# Altium PCB PCB1.PcbDoc
Units mil, origin at the board's own origin, x right, y up, seen from the top; angles counter-clockwise.
Board outline 6000 x 4000 mil, 2 copper layers (Top Layer, Bottom Layer); 47 components, 98 nets, 286 pads, 0 vias.
Unrouted connection lines stored in the file: 172.
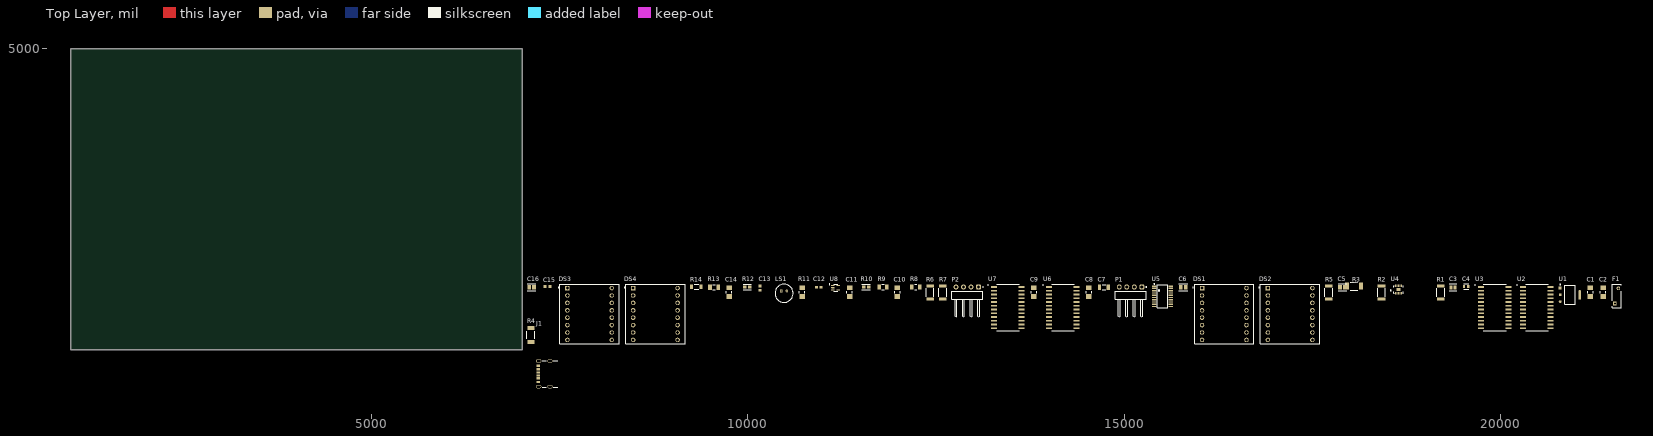
[diagram p0: Top Layer view]
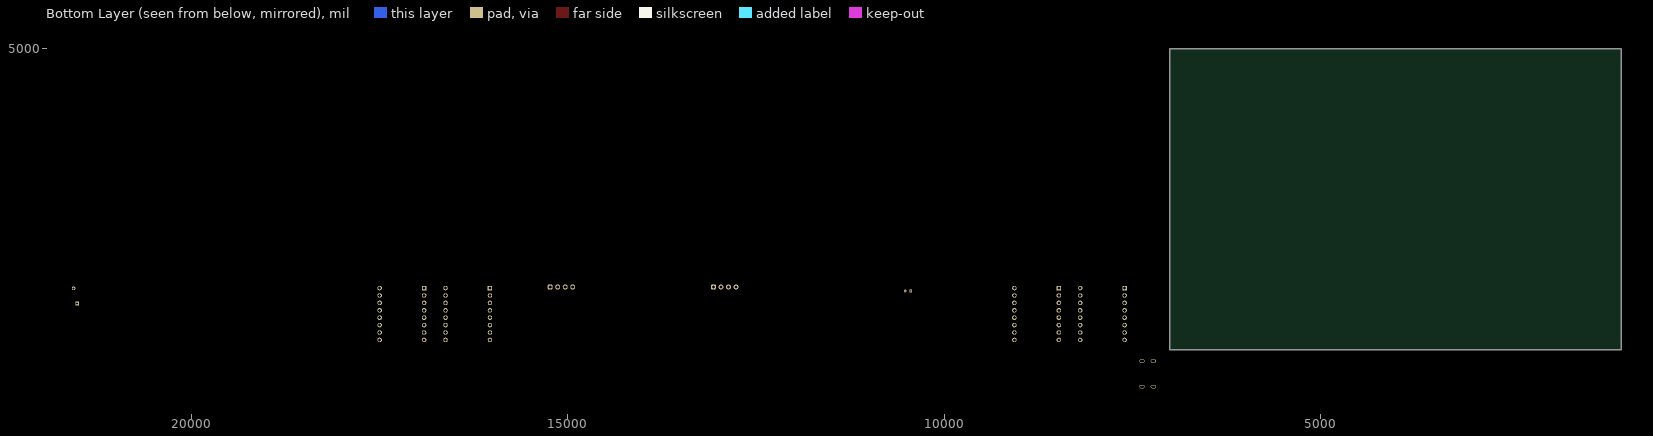
[diagram p1: Bottom Layer view, seen from below]

## Layer stack, top to bottom
Top Solder: solder mask 0.4, Solder Resist, Dk 3.5
Top Layer: signal copper 1.4
Dielectric 1: dielectric 12.6, FR-4, Dk 4.8
Bottom Layer: signal copper 1.4
Bottom Solder: solder mask 0.4, Solder Resist, Dk 3.5

## Board outline
1000,1000 7000,1000 7000,5000 1000,5000

## Design rules (kind name [scope] priority, off if disabled: settings)
Clearance [All] p1: gap=10 ignorepadtopadclearanceinfootprint=FALSE
PolygonConnect [All] p1: connectstyle=Relief reliefconductorwidth=10 reliefentries=4 polygonreliefangle="90 Angle" airgapwidth=10
RoutingVias [All] p1: holewidth=28 width=50 viastyle="Through Hole" minholewidth=28 minwidth=50 maxholewidth=28 maxwidth=50
SolderMaskExpansion [All] p1: expansion=4 istentingtop=FALSE
SupplyNets "Schematic Supply Nets_3" [InNet('5V')] p1: voltage=0.000
SupplyNets "Schematic Supply Nets_2" [InNet('GND')] p2: voltage=0.000
SupplyNets "Schematic Supply Nets_1" [InNet('3V3')] p3: voltage=0.000
SupplyNets "Schematic Supply Nets" [InNet('+3V3')] p4: voltage=0.000
Width [All] p1: maxlimit=10 minlimit=10 preferedwidth=10
30 further rules are at their usual default settings.

## Components (designator, comment, footprint, x,y, rotation, side; value= is the part's Value field where it differs from the comment)
C1 "HMK316B7104ML-T" FP-1206-L_3_2_0_15-W_1_6-IPC_A 21195,1765 r90 top
C2 "HMK316B7104ML-T" FP-1206-L_3_2_0_15-W_1_6-IPC_A 21365,1765 r90 top
C3 "CL21A106MPFNNNF" FP-CL21-IPC_C 19370,1830 r0 top
C4 "CC0603MRX5R5BB226" FP-CC0603-DC-MFG 19545,1840 r0 top
C5 "CL21F105ZAFNNNF" FP-CL21-IPC_B 17900,1830 r0 top
C6 "CL21F105ZAFNNNF" FP-CL21-IPC_B 15785,1830 r0 top
C7 "2.2u" CAPC3216X180N 14730,1830 r0 top
C8 "HMK316B7104ML-T" FP-1206-L_3_2_0_15-W_1_6-IPC_A 14530,1765 r90 top
C9 "HMK316B7104ML-T" FP-1206-L_3_2_0_15-W_1_6-IPC_A 13800,1765 r90 top
C10 "HMK316B7104ML-T" FP-1206-L_3_2_0_15-W_1_6-IPC_A 11985,1765 r90 top
C11 "HMK316B7104ML-T" FP-1206-L_3_2_0_15-W_1_6-IPC_A 11350,1765 r90 top
C12 "10n" CAPC1608X95N 10940,1830 r0 top
C13 "22n" CAPC1608X97N 10160,1820 r90 top
C14 "HMK316B7104ML-T" FP-1206-L_3_2_0_15-W_1_6-IPC_A 9750,1765 r90 top
C15 "100p" RESC1608X55 7335,1840 r0 top
C16 "CL21F105ZAFNNNF" FP-CL21-IPC_B 7125,1830 r0 top
DS1 "TA08-81GWA" DISPLAY_TA08-81GWA 16330,1475 r0 top
DS2 "TA08-81GWA" DISPLAY_TA08-81GWA 17205,1475 r0 top
DS3 "TA08-81GWA" DISPLAY_TA08-81GWA 7895,1475 r0 top
DS4 "TA08-81GWA" DISPLAY_TA08-81GWA 8770,1475 r0 top
F1 "MF-R050" FP-MF-R050-MFG 21545,1715 r90 top value=0.41-0.77Ω
J1 "10164359-00011LF" AMPHENOL_10164359-00011LF 7335,680 r90 top
LS1 "POM-2738P-R" FP-POM-2738P-R-MFG 10480,1750 r0 top value=2.2kΩ
P1 "ST-LINK" 61300411021 15085,1725 r0 top
P2 "UART" 61300411021 12915,1725 r0 top
R1 "CR2010-JW-103ELF" FP-CR2010-IPC_C 19205,1760 r90 top
R2 "CR2010-JW-103ELF" FP-CR2010-IPC_C 18420,1760 r90 top
R3 "5.1k" FP-RK73H2H-MFG 18055,1845 r0 top
R4 "5.1k" FP-RK73H2H-MFG 7115,1195 r90 top
R5 "CR2010-JW-103ELF" FP-CR2010-IPC_C 17720,1760 r90 top
R6 "CR2010-JW-103ELF" FP-CR2010-IPC_C 12420,1760 r90 top
R7 "CR2010-JW-103ELF" FP-CR2010-IPC_C 12590,1760 r90 top
R8 "MCA1206MD2001BP100" FP-MCA1206-MFG 12230,1835 r0 top
R9 "MCA1206MD2001BP100" FP-MCA1206-MFG 11795,1835 r0 top
R10 "CRCW06031M00JNEAHP" FP-CRCW0603-HPe3-IPC_A 11570,1835 r0 top
R11 "RMCF1206JG1K00" FP-RMCF1206-IPC_A 10720,1765 r90 top
R12 "CRCW06031M00JNEAHP" FP-CRCW0603-HPe3-IPC_A 9990,1835 r0 top
R13 "MCA1206MD1002DP500" FP-MCA1206-IPC_B 9550,1830 r0 top
R14 "RT1206DRE07100KL" FP-RT1206-MFG 9315,1835 r0 top value=100KΩ
U1 "AMS1117-3.3" FP-AMS1117-IPC_C 20925,1730 r0 top
U2 "MAX7219CWGT" SOIC127P1032X265-24N 20485,1560 r0 top
U3 "MAX7219CWGT" SOIC127P1032X265-24N 19925,1560 r0 top
U4 "3V3-5V" FP-SOT762-1-MFG 18645,1800 r0 top
U5 "STM8S103F3P6" SOP65P640X120-20N 15510,1685 r0 top
U6 "MAX7219CWGT" SOIC127P1032X265-24N 14185,1560 r0 top
U7 "MAX7219CWGT" SOIC127P1032X265-24N 13455,1560 r0 top
U8 "MAX4466EXK" SOT65P210X110-5N 11165,1825 r0 top

## Footprints (in the part's own frame and the unit in brackets; to place one, negate y for a bottom-side part, rotate by r counter-clockwise, add the part's x,y. Pads: shape width x height; smd on the part's side, far side on the other; paste and mask are expansions set on the pad)
61300411021 [mm] "Pin Header, pitch 2.54 mm, THT, Angled, single row, 4p"
  rrect50% 1.65x1.65 hole 1.1: 1(3.81,2.77)
  round 1.65 hole 1.1: 2(1.27,2.77) 3(-1.27,2.77) 4(-3.81,2.77)
  silkscreen extent -5.23,-7.27 5.42,2.87, body extent -5.08,-7.27 5.08,3.09, height 2.58
AMPHENOL_10164359-00011LF [mm]
  rect 0.7x1.2 smd: A5(-0.5,3.03) B5(0.5,3.03)
  rect 0.76x1.2 smd: A9(1.52,3.03) B9(-1.52,3.03)
  rect 0.8x1.2 smd: A12(2.75,3.03) B12(-2.75,3.03)
  oval 1.15x1.75 hole 0.65 slot 1.25 at 90 deg: SH1(-4.32,2.95) SH2(4.32,2.95) SH3(-4.32,-0.85) SH4(4.32,-0.85)
  silkscreen extent -4.47,-3.45 4.47,1.76, body extent -4.47,-3.45 4.47,3.45, height 3.26
CAPC1608X95N [mm]
  rect 1.01x0.93 smd: 1(-0.709,0) 2(0.709,0)
  body extent -0.8,-0.4 0.8,0.4, height 0.95
CAPC1608X97N [mm]
  rect 0.98x0.97 smd paste+0 mask+0.102: 1(-0.744,0) 2(0.744,0)
  body extent -0.8,-0.4 0.8,0.4, height 0.97
CAPC3216X180N [mm]
  rect 1.16x1.82 smd: 1(-1.475,0) 2(1.475,0)
  silkscreen extent -0.57,-0.9 0.57,0.9, body extent -1.6,-0.8 1.6,0.8, height 1.8
DISPLAY_TA08-81GWA [mm]
  rect 1.5x1.5 / inner round 1.5 / far side rect 1.5x1.5 hole 1: 1(-7.5,8.75)
  round 1.5 hole 1: 2(-7.5,6.25) 3(-7.5,3.75) 4(-7.5,1.25) 5(-7.5,-1.25) 6(-7.5,-3.75) 7(-7.5,-6.25) 8(-7.5,-8.75) 9(7.5,-8.75) 10(7.5,-6.25) 11(7.5,-3.75) 12(7.5,-1.25) 13(7.5,1.25) 14(7.5,3.75) 15(7.5,6.25) 16(7.5,8.75)
  silkscreen extent -10.6,-10 10,10, body extent -10,-10 10,10, height 6
FP-1206-L_3_2_0_15-W_1_6-IPC_A [mil]
  rect 61.24x73.16 smd paste+0 mask+0: 1(-57.14,0) 2(57.14,0)
  silkscreen extent -15,-37 15,37, body extent -107,-56 107,56, height 10
FP-AMS1117-IPC_C [mm]
  rect 1.004x0.872 smd paste+0 mask+0: 1(-3.295,2.29)
  rrect100% 1.004x0.872 smd paste+0 mask+0: 2(-3.295,0) 3(-3.295,-2.29)
  rrect87% 1.004x3.182 smd paste+0 mask+0: 4(3.295,0)
  silkscreen extent -3.42,-3.25 1.75,3.62, body extent -3.9,-3.35 3.9,3.35, height 0.25
FP-CC0603-DC-MFG [mm]
  rect 0.8x0.9 smd paste+0 mask+0: 1(-0.75,0) 2(0.75,0)
  silkscreen extent -0.85,-0.87 0.85,0.87, body extent -1.43,-0.82 1.43,0.82, height 0.25
FP-CL21-IPC_B [mil]
  rect 49.4x57.33 smd paste+0 mask+0: 1(-32.51,0) 2(32.51,0)
  silkscreen extent -57,-44 57,44, body extent -67,-39 67,39, height 10
FP-CL21-IPC_C [mil]
  rect 41.52x53.39 smd paste+0 mask+0: 1(-28.57,0) 2(28.57,0)
  silkscreen extent -49,-44 49,44, body extent -53,-32 53,32, height 10
FP-CR2010-IPC_C [mil]
  rect 41.56x100.72 smd paste+0 mask+0: 1(-86.66,0) 2(86.66,0)
  silkscreen extent -54,-52 54,52, body extent -111,-56 111,56, height 10
FP-CRCW0603-HPe3-IPC_A [mil]
  rect 45.6x41.82 smd paste+0 mask+0: 1(-32.56,0) 2(32.56,0)
  silkscreen extent -55,-37 55,37, body extent -75,-41 75,41, height 10
FP-MCA1206-IPC_B [mil]
  rect 49.44x69.22 smd paste+0 mask+0: 1(-54.18,0) 2(54.18,0)
  silkscreen extent -18,-35 18,35, body extent -89,-44 89,44, height 10
FP-MCA1206-MFG [mm]
  rect 1.15x1.75 smd paste+0 mask+0: 1(-1.325,0) 2(1.325,0)
  silkscreen extent -0.38,-0.87 0.38,0.87, body extent -2,-0.97 2,0.97, height 0.25
FP-MF-R050-MFG [mm]
  rect 1.2x1.2 hole 0.7 paste-2539.97 mask+0: 1(-2.55,0.6)
  round 1.2 hole 0.7 paste-2539.97 mask+0: 2(2.55,-0.6)
  silkscreen extent -3.95,-1.55 3.95,1.55, body extent -4.05,-1.65 4.05,1.65, height 0.25
FP-POM-2738P-R-MFG [mm]
  rect 0.9x0.9 hole 0.4 paste-2539.97 mask+0: 1(-0.95,0.8)
  round 0.9 hole 0.4 paste-2539.97 mask+0: 2(0.95,0.8)
  silkscreen extent -3.05,-3.05 3.05,3.05, body extent -3.15,-3.15 3.15,3.15, height 0.25
FP-RK73H2H-MFG [mm]
  rect 1.4x2.3 smd paste+0 mask+0: 1(-2.35,0) 2(2.35,0)
  silkscreen extent -1.28,-1.35 1.28,1.35, body extent -3.15,-1.45 3.15,1.45, height 0.25
FP-RMCF1206-IPC_A [mil]
  rect 63.14x73.16 smd paste+0 mask+0: 1(-58.09,0) 2(58.09,0)
  silkscreen extent -15,-37 15,37, body extent -109,-56 109,56, height 10
FP-RT1206-MFG [mm]
  rect 1x1.5 smd paste+0 mask+0: 1(-1.6,0) 2(1.6,0)
  silkscreen extent -0.72,-0.85 0.72,0.85, body extent -2.2,-0.95 2.2,0.95, height 0.25
FP-SOT762-1-MFG [mm]
  rect 0.9x0.24 smd paste-1000 mask+0: 1(-1.55,-0.25) 7(1.55,-0.25) 8(1.55,0.25) 14(-1.55,0.25)
  rect 0.24x0.9 smd paste-1000 mask+0: 2(-1,-1.3) 3(-0.5,-1.3) 4(0,-1.3) 5(0.5,-1.3) 6(1,-1.3) 9(1,1.3) 10(0.5,1.3) 11(0,1.3) 12(-0.5,1.3) 13(-1,1.3)
  rect 1.4x0.9 smd paste-1000 mask+0: 15(0,0)
  silkscreen extent -2.72,-1.3 1.55,1.3, body extent -2.12,-1.88 2.12,1.88, height 0.25
RESC1608X55 [mm]
  rect 1.1x1 smd paste+0 mask+0.102: 1(-0.85,0) 2(0.85,0)
  body extent -0.8,-0.4 0.8,0.4, height 0.87
SOIC127P1032X265-24N [mm]
  rrect25% 2.05x0.59 smd: 1(-4.655,6.985) 2(-4.655,5.715) 3(-4.655,4.445) 4(-4.655,3.175) 5(-4.655,1.905) 6(-4.655,0.635) 7(-4.655,-0.635) 8(-4.655,-1.905) 9(-4.655,-3.175) 10(-4.655,-4.445) 11(-4.655,-5.715) 12(-4.655,-6.985) 13(4.655,-6.985) 14(4.655,-5.715) 15(4.655,-4.445) 16(4.655,-3.175) 17(4.655,-1.905) 18(4.655,-0.635) 19(4.655,0.635) 20(4.655,1.905) 21(4.655,3.175) 22(4.655,4.445) 23(4.655,5.715) 24(4.655,6.985)
  silkscreen extent -6.8,-7.8 3.8,7.8, body extent -5.16,-7.7 5.16,7.7, height 2.65
SOP65P640X120-20N [mm]
  rect 1.5x0.45 smd: 1(-2.794,4.064) 2(-2.794,3.302) 3(-2.794,2.54) 4(-2.794,1.778) 5(-2.794,1.016) 6(-2.794,0.254) 7(-2.794,-0.508) 8(-2.794,-1.27) 9(-2.794,-2.032) 10(-2.794,-2.794) 11(2.794,-2.794) 12(2.794,-2.032) 13(2.794,-1.27) 14(2.794,-0.508) 15(2.794,0.254) 16(2.794,1.016) 17(2.794,1.778) 18(2.794,2.54) 19(2.794,3.302) 20(2.794,4.064)
  silkscreen extent -2.89,-3.25 1.83,4.93, body extent -3.2,-3.25 3.2,4.57, height 0.25
SOT65P210X110-5N [mm]
  rrect50% 1.19x0.4 smd: 1(-0.889,0.762) 2(-0.889,0) 3(-0.889,-0.762) 4(0.889,-0.762) 5(0.889,0.762)
  silkscreen extent -2.17,-1.22 0.68,1.24, body extent -1.1,-1 1.1,1, height 1.1

## Part data
C1 C2 C8 C9 C10 C11 C14: library part CMP-14477-001727-2, "None", Capacitance=100n, Case Code (Imperial)=1206, Case Code (Metric)=3216, Dielectric=X7R, Max Operating Temperature=125°C, Min Operating Temperature=-55°C, Package Quantity=2000, Resistor Type=Ceramic, Tolerance=20%, Voltage Rating=100V, Case/Package=1206, Construction=Flat, Depth=1.6mm, Halogen Free="Halogen Free", Height=1.6mm, Length=3.2mm, Mount="Surface Mount", Number of Pins=2, Packaging="Tape and Reel", Radiation Hardening=No, RoHS Compliant=Yes, Series=M, Termination=SMD/SMT, Thickness=0.071inch, Voltage Rating (DC)=100V, Weight=0.000571oz, Width=0.063inch
C3: library part CMP-13271-002245-1, "CL21 Series 0805 10uF 10V ±20% Tolerance X5R Multilayer Ceramic Chip Capacitor", Capacitance=10u, Case/Package=0805, Dielectric=X5R, Max Operating Temperature=85°C, Min Operating Temperature=-55°C, Package Quantity=10000, Tolerance=20%, Voltage Rating=10V, Depth=1.25mm, Height=1.25mm, Length=2mm, Mount="Surface Mount", Packaging="Tape and Reel", Radiation Hardening=No, Thickness=0.053inch, Voltage Rating (DC)=10V, Width=0.049inch
C4: library part CMP-2000-06075-2, "CAP CER 22UF 6.3V X5R 0603", Capacitance=22u, Case Code (Imperial)=0603, Case Code (Metric)=1608, Dielectric=X5R, Max Operating Temperature=85°C, Min Operating Temperature=-55°C, Package Quantity=4000, Resistor Type=Ceramic, Tolerance=20%, Voltage Rating=6.3V, Case/Package=0603, Depth=0.8mm, Halogen Free="Halogen Free", Lead Free="Lead Free", Length=0.063inch, Mount="Surface Mount", Packaging="Tape and Reel", RoHS Compliant=Yes, Termination=SMD/SMT, Thickness=0.035inch, Voltage Rating (DC)=6.3V, Weight=7.1E-05oz, Width=0.031inch
C5 C6 C16: library part CMP-13271-002018-1, "CL21 Series 0805 1uF 25V -20/+80% Tolerance Y5V Multilayer Ceramic Chip Capacitor", Capacitance=1u, Case/Package=0805, Dielectric=Y5V, Max Operating Temperature=85°C, Min Operating Temperature=-30°C, Package Quantity=10000, Tolerance=80%, Voltage Rating=25V, Depth=1.25mm, Height=1.25mm, Length=2mm, Mount="Surface Mount", Packaging="Tape and Reel", Radiation Hardening=No, Thickness=0.053inch, Voltage Rating (DC)=25V, Width=0.049inch
C7: library part C1206C225K8RACTU, "1206 C 2.2uF Ceramic Multilayer Capacitor, 10 VDC, +125degC, X7R Dielec, +/-10%", Package="1206-2 KEMET", Check_prices=https://www.snapeda.com/parts/C1206C225K8RACTU/KEMET/view-part/?ref=eda, MF=KEMET, MP=C1206C225K8RACTU, SnapEDA_Link=https://www.snapeda.com/parts/C1206C225K8RACTU/KEMET/view-part/?ref=snap
C12: library part CGA3E2X8R2A103K080AD, "Cap Ceramic 0.01uF 100V X8R 10% Pad SMD 0603 150Â°C Automotive T/R", Package="1608 TDK", Check_prices=https://www.snapeda.com/parts/CGA3E2X8R2A103K080AD/TDK/view-part/?ref=eda, MF=TDK, MP=CGA3E2X8R2A103K080AD, SnapEDA_Link=https://www.snapeda.com/parts/CGA3E2X8R2A103K080AD/TDK/view-part/?ref=snap
C13: library part VJ0603Y223KXAAC, "0.022 ÂµF Â±10% 50V Ceramic Capacitor X7R 0603 (1608 Metric)", Package="0603-2 VISHAY", Check_prices=https://www.snapeda.com/parts/VJ0603Y223KXAAC/Vishay/view-part/?ref=eda, MF="Vishay Vitramon", MP=VJ0603Y223KXAAC, SnapEDA_Link=https://www.snapeda.com/parts/VJ0603Y223KXAAC/Vishay/view-part/?ref=snap
C15: library part VJ0603A101FXAAC, "Capacitor, Ceramic, 100pF, 50VDC, 1-% Tol, 1+% Tol, C0G-TC Code, -30, 30ppm-TC", Package="0603 Vishay", Check_prices=https://www.snapeda.com/parts/VJ0603A101FXAAC/Vishay/view-part/?ref=eda, MF=Vishay, MP=VJ0603A101FXAAC, SnapEDA_Link=https://www.snapeda.com/parts/VJ0603A101FXAAC/Vishay/view-part/?ref=snap
DS1 DS2 DS3 DS4: "DISPLAY, DOT MATRIX, 0.8, 8X8, GREEN; Display Dots x Lines: 8 x 8; LED Colour: Gr", Package="DIP-16 Kingbright", Availability="Not in stock", Check_prices=https://www.snapeda.com/parts/TA08-81GWA/Kingbright/view-part/?ref=eda, MF=Kingbright, MP=TA08-81GWA, Price=None, SnapEDA_Link=https://www.snapeda.com/parts/TA08-81GWA/Kingbright/view-part/?ref=snap
F1: library part CMP-07400-000037-1, "PTC RESET FUSE 60V 500MA RADIAL", Ambient Temperature Range High=+85°C, Ambient Temperature Range Low=-40°C, Current Rating=40A, Hold Current=0.5A, Manufacturer=Bourns, Resistance=0.41-0.77, Temperature="-40°C to +85°C", Trip Current=1A, Voltage Rating=60V, Automotive=No, Category=Fuse, ComponentLink2Description=Datasheet, ComponentLink2URL=https://upverter.com/datasheet/a1b715b2a3574ae967878e49fe70c2811aecae4b.pdf, Device Class L1="Circuit Protection", Device Class L2="PTC Resettable Fuses", Device Class L3=unset, Digikey Description="PTC RESET FUSE 60V 500MA RADIAL", Height=13.7mm, Lead Free=Yes, Manufacturer Part Number=MF-R050, Mouser Description="PTC Resettable Fuse 0.5A(hold) 1A(trip) 60V 40A 0.75W 4s 0.41Ohm Radial 7.9 X 3.1mm Bulk", Octopart=https://octopart.com/mf-r050-bourns-19418, Package=MF-R050, RoHS=TRUE, Temperature Range High=+85°C, Temperature Range Low=-40°C, Trip Time=4s
J1: "USB Type C Receptacle SMT Single Row 6Pin", Package=None, Check_prices=https://www.snapeda.com/parts/1016435900011LF/Amphenol/view-part/?ref=eda, MF=Amphenol, MP=1016435900011LF, SnapEDA_Link=https://www.snapeda.com/parts/1016435900011LF/Amphenol/view-part/?ref=snap
LS1: library part CMP-103887-000001-1, "MIC COND ANALOG OMNI -38DB", Current=0.5mA, Manufacturer="PUI Audio, Inc.", Max Supply Voltage=10V, Operating Supply Voltage=2V, Package=0, Resistance=2.2kΩ, Automotive=No, Category=Speak, ComponentLink2Description=Datasheet, ComponentLink2URL=http://www.puiaudio.com/pdf/POM-2738P-R.pdf, Device Class L1=Electromechanical, Device Class L2="Audio Products", Device Class L3=Microphones, Digikey Description="MIC COND ANALOG OMNI -38DB", Direction=Omidirectional, Height=2.9mm, Lead Free=Yes, Manufacturer Part Number=POM-2738P-R, Mouser Description="Mic Omni-Directional 2200Ohm -38±3dB 10Vdc Round Pin", Octopart=https://octopart.com/pom-2738p-r-pui+audio-19251807, RoHS=TRUE
P1 P2: library part CMP-1502-01063-3, Color=Black, Contact Resistance=20mΩ, Current Rating=3A, Operating Supply Voltage=250V, Connector Type="Male Pin", Contact Material=Copper, Contact Mating Length=5.9944mm, Contact Plating=Gold, Gender=Male, Lead Pitch=2.54mm, Mount="Through Hole", NexarPartId=31153320, Number of Contacts=4, Number of Pins=4, Number of Positions=4, Number of Rows=1, Pitch=2.54mm, REACH SVHC=Unknown, RoHS=Compliant, Termination=Solder
R1 R2 R5 R6 R7: library part CMP-07231-003456-1, "Thick Film Chip Resistors 2010 10kΩ 0.5W 5% 200ppm/°C", Case Code (Imperial)=2010, Case Code (Metric)=5025, Max Operating Temperature=155°C, Min Operating Temperature=-55°C, Package Quantity=4000, Power Rating=500mW, Resistance=10k, Temperature Coefficient=200ppm/°C, Tolerance=5%, Voltage Rating=200V, Case/Package=2010, Composition="Thick Film", Contact Plating=Tin, Height=0.6mm, Length=5mm, Mount="Surface Mount", Packaging="Tape and Reel", Radiation Hardening=No, Termination=SMD/SMT, Width=2.5mm
R3 R4: library part CMP-04015-108525-1, "5.1kΩ 1% 0.75W Chip Resistor 2010 Thick Film AEC-Q200 Qualified", RoHS Compliant=Yes
R8 R9: library part CMP-02407-006043-1, "Res MC AT Precision Thin Film 1206 2kΩ 0.1% 0.4W ±25ppm/°C Molded Paper T/R", Case Code (Imperial)=1206, Case Code (Metric)=3216, Max Operating Temperature=155°C, Max Power Dissipation=400mW, Min Operating Temperature=-55°C, Package Quantity=1000, Resistance=2k, Temperature Coefficient=25ppm/°C, Tolerance=0.1%, Voltage Rating=200V, Case/Package=1206, Composition="Thin Film", Features="Automotive AEC-Q200", Height=0.026inch, Length=0.126inch, Number of Terminations=2, Packaging="Tape and Reel", Power Rating=400mW, Termination=SMD/SMT, Weight=0.000325oz, Width=0.063inch
R10 R12: library part CMP-02407-009732-1, "RES Thick Film, 1MΩ, 5%, 0.33W, 200ppm/°C, 0603", Case Code (Imperial)=0603, Case Code (Metric)=1608, Max Operating Temperature=155°C, Max Power Dissipation=250mW, Min Operating Temperature=-55°C, Package Quantity=1, Resistance=1M, Temperature Coefficient=200ppm/°C, Tolerance=5%, Voltage Rating=75V, Case/Package=0603, Composition="Thick Film", Contact Plating=Tin, Features="Automotive AEC-Q200", Height=0.022inch, Lead Free="Lead Free", Length=0.063inch, Number of Terminations=2, Packaging="Tape and Reel", Power Rating=250mW, Radiation Hardening=No, Termination=SMD/SMT, Weight=7.1E-05oz, Width=0.8mm
R11: library part CMP-26527-006126-1, "1kΩ ±5% 0.25W 1206 Thick Film Chip Resistor AEC-Q200 compliant", Case Code (Imperial)=1206, Case Code (Metric)=3216, Max Operating Temperature=155°C, Max Power Dissipation=250mW, Min Operating Temperature=-55°C, Resistance=1k, Resistor Type="Thick Film", Temperature Coefficient=200ppm/°C, Tolerance=5%, Case/Package=1206, Contact Plating=Tin, Features="Automotive AEC-Q200", Height=0.028inch, Length=0.126inch, Mount="Surface Mount", Number of Terminations=2, Packaging="Tape and Reel", Radiation Hardening=No, RoHS Compliant=Yes, Series=RMCF, Width=0.063inch
R13: library part CMP-02407-011266-1, "Res MC AT Professional Thin Film 1206 10kΩ 0.5% 0.4W ±25ppm/°C Molded Paper T/R", Case Code (Imperial)=1206, Case Code (Metric)=3216, Max Operating Temperature=175°C, Max Power Dissipation=400mW, Min Operating Temperature=-55°C, Resistance=10k, Resistor Type="Thin Film", Temperature Coefficient=25ppm/°C, Tolerance=0.5%, Voltage Rating=200V, Case/Package=1206, Features="Automotive AEC-Q200", Height=0.55mm, Length=3.2mm, Number of Terminations=2, Packaging="Tape and Reel", Power Rating=400mW, RoHS Compliant=Yes, Series="MCA AT - Professional", Termination=SMD/SMT, Weight=0.000325oz, Width=1.6mm
R14: library part CMP-2003-04271-2, "RES SMD 100K OHM 0.5% 1/4W 1206", Manufacturer=Yageo, Package=RT1206, Power Rating=0.25W, Resistance=100k, Temperature="-55°C to +155°C", Temperature Coefficient="50 ppm/°C", Temperature Range High=+155°C, Temperature Range Low=-55°C, Tolerance=0.0001, Voltage Rating=200V, Automotive=No, Category=Res, ComponentLink2Description=Datasheet, ComponentLink2URL=http://www.yageo.com/documents/recent/PYu-RT_1-to-0.01_RoHS_L_9.pdf, Composition="Thin Film", Device Class L1="Passive Components", Device Class L2=Resistors, Device Class L3="Chip SMD Resistors", Digikey Description="RES SMD 100K OHM 0.5% 1/4W 1206", Footprint Url=http://www.yageo.com/exep/pages/download/literatures/PYu-R_Mount_10.pdf, Height=0.65mm, Ipc Land Pattern Name=RESC310160X55, Lead Free=Yes, Manufacturer Part Number=RT1206DRE07100KL, Mouser Description="Res Thin Film 1206 100K Ohm 0.5% 1/4W ±50ppm/°C Molded SMD Paper T/R", Octopart=https://octopart.com/rt1206dre07100kl-yageo-1189867, RoHS=TRUE, Series=RT
U1: library part CMP-209535-000001-1, "LDO Voltage Regulators 1A, 3.3V", Dropout Voltage=1.1V, Manufacturer="Advanced Monolithic Systems", Max Junction Temp=+125°C, Max Power Dissipation=1.2W, Max Supply Voltage=15V, Nominal Supply Current=5mA, Output Current=1A, Output Voltage=3.3V, Package=AMS1117, Temperature="-40°C to +125°C", Temperature Range Low=-40°C, Automotive=No, Category=IC, ComponentLink2Description=Datasheet, ComponentLink2URL=http://www.advanced-monolithic.com/pdf/ds1117.pdf, Device Class L1="Integrated Circuits (ICs)", Device Class L2="Power Management ICs", Device Class L3="Voltage Regulators - Linear", Height=1.8mm, Ipc Land Pattern Name=SOT229P700X180-4, Lead Free=Yes, Manufacturer Part Number=AMS1117-3.3, Number Of Outputs=1, Octopart=https://octopart.com/ams1117-3.3-advanced+monolithic+systems-25899300, Output Type=Fixed, RoHS=TRUE, Standoff Height=0.64mm, Temperature Range High=+125°C
U2 U3 U6 U7: "IC DRVR 7 SEGMNT 8 DIGIT 24SOIC", Package="SOIC-24 Maxim", Check_prices=https://www.snapeda.com/parts/MAX7219CWG+/Analog+Devices/view-part/?ref=eda, MF="Analog Devices", MP=MAX7219CWG+, SnapEDA_Link=https://www.snapeda.com/parts/MAX7219CWG+/Analog+Devices/view-part/?ref=snap
U4: library part CMP-14350-000006-1, "IC BUFF NON-INVERT 5.5V 14DHVQFN"
U5: "STM8 series Microcontroller IC 8-Bit 16MHz 8KB (8K x 8) FLASH 20-TSSOP", Package="TSSOP-20 STMicroelectronics", Check_prices=https://www.snapeda.com/parts/STM8S103F3P6/STMicroelectronics/view-part/?ref=eda, MF=STMicroelectronics, MP=STM8S103F3P6, SnapEDA_Link=https://www.snapeda.com/parts/STM8S103F3P6/STMicroelectronics/view-part/?ref=snap
U8: "Audio Amp Microphone 1-CH Mono Class-AB 5-Pin SC-70 T/R", Package="SC-70-5 Maxim", Check_prices=https://www.snapeda.com/parts/MAX4466EXK+T/Analog+Devices/view-part/?ref=eda, MF="Analog Devices", MP=MAX4466EXK+T, SnapEDA_Link=https://www.snapeda.com/parts/MAX4466EXK+T/Analog+Devices/view-part/?ref=snap

## Nets (pads, with @x,y where several pads share a name; then routed paths per layer and width w, separated by ;. In a path a pad name is that pad's centre, name@x,y a point inside that pad or via, vN(x,y) a via of type N, cw(c..) or ccw(c..) an arc to the next point about the centre after c; other vN are vias at no path point)
3V3: C6.1 P1.1 P2.1 R5.1 U5.9
5V: C1.1 C2.1 C3.1 C8.1 C9.1 C11.1 F1.2 R1.1 R2.1 R6.2 R7.2 R8.2 R10.1 U1.3 U2.19 U3.19 U4.14 U6.19 U7.19
+3V3: C4.1 U1.2 U1.4
DOUT: U2.24 U7.1
GND: C1.2 C2.2 C3.2 C4.2 C5.1 C6.2 C7.1 C8.2 C9.2 C10.2 C13.1 C14.2 C16.2 J1.A12 J1.B12 J1.SH1 J1.SH2 J1.SH3 J1.SH4 LS1.2 P1.3 P2.4 R3.2 R4.2 R12.2 U1.1 U2.4 U2.9 U3.4 U3.9 U4.7 U4.15 U5.7 U6.4 U6.9 U7.4 U7.9
K1: DS1.9 U3.2
K1_2: DS2.9 U2.2
K1_3: DS3.9 U7.2
K1_4: DS4.9 U6.2
K2: DS1.14 U3.11
K2_2: DS2.14 U2.11
K2_3: DS3.14 U7.11
K2_4: DS4.14 U6.11
K3: DS1.8 U3.6
K3_2: DS2.8 U2.6
K3_4: DS4.8 U6.6
K4: DS1.12 U3.7
K4_2: DS2.12 U2.7
K4_3: DS3.12 U7.7
K4_4: DS4.12 U6.7
K5: DS1.1 U3.3
K5_2: DS2.1 U2.3
K5_3: DS3.1 U7.3
K5_4: DS4.1 U6.3
K6: DS1.7 U3.10
K6_2: DS2.7 U2.10
K6_3: DS3.7 U7.10
K6_4: DS4.7 U6.10
K7: DS1.2 U3.5
K7_2: DS2.2 U2.5
K7_3: DS3.2 U7.5
K7_4: DS4.2 U6.5
K8: DS1.5 U3.8
K8_2: DS2.5 U2.8
K8_3: DS3.5 U7.8
K8_4: DS4.5 U6.8
K33_3: DS3.8 U7.6
LOAD: U4.9 U5.10
LOAD_H: U2.12 U3.12 U4.8 U6.12 U7.12
Mic_OUT: C13.2 R11.2 U5.14
MOSI: U4.5 U5.16
MOSI_H: U3.1 U4.6
NetC7_2: C7.2 U5.8
NetC10_1: C10.1 R8.1 R9.2
NetC11_2: C11.2 U8.5
NetC12_1: C12.1 LS1.1 R9.1
NetC12_2: C12.2 R10.2 R12.1 U8.1
NetC14_1: C14.1 U8.2
NetC15_1: C15.1 R13.2 R14.1 U8.3
NetC15_2: C15.2 R11.1 R14.2 U8.4
NetC16_1: C16.1 R13.1
NetF1_1: F1.1 J1.A9 J1.B9
NetJ1_A5: J1.A5 R3.1
NetJ1_B5: J1.B5 R4.1
NetR1_2: R1.2 U3.18
NetR2_2: R2.2 U2.18
NetR6_1: R6.1 U7.18
NetR7_1: R7.1 U6.18
NetU2_1: U2.1 U3.24
NetU6_1: U6.1 U7.24
NRST: C5.2 P1.4 R5.2 U5.4
RX: P2.3 U5.3
SCK: U4.2 U5.15
SCK_H: U2.13 U3.13 U4.3 U6.13 U7.13
SWIM: P1.2 U5.18
TX: P2.2 U5.2
А1: DS1.13 U3.14
А1_2: DS2.13 U2.14
А1_3: DS3.13 U7.14
А1_4: DS4.13 U6.14
А2: DS1.3 U3.16
А2_2: DS2.3 U2.16
А2_3: DS3.3 U7.16
А2_4: DS4.3 U6.16
А3: DS1.4 U3.20
А3_2: DS2.4 U2.20
А3_3: DS3.4 U7.20
А3_4: DS4.4 U6.20
А4: DS1.10 U3.23
А4_2: DS2.10 U2.23
А4_3: DS3.10 U7.23
А4_4: DS4.10 U6.23
А5: DS1.6 U3.22
А5_2: DS2.6 U2.22
А5_3: DS3.6 U7.22
А5_4: DS4.6 U6.22
А6: DS1.11 U3.21
А6_2: DS2.11 U2.21
А6_3: DS3.11 U7.21
А6_4: DS4.11 U6.21
А7: DS1.15 U3.15
А7_2: DS2.15 U2.15
А7_3: DS3.15 U7.15
А7_4: DS4.15 U6.15
А8: DS1.16 U3.17
А8_2: DS2.16 U2.17
А8_3: DS3.16 U7.17
А8_4: DS4.16 U6.17
pads on no net: U4.1 U4.4 U4.10 U4.11 U4.12 U4.13 U5.1 U5.5 U5.6 U5.11 U5.12 U5.13 U5.17 U5.19 U5.20 U6.24

## Text inside footprints (layer, text, board x,y; h text height)
J1: Top 3D Body "PCB EDGE" at 7457.05,896.54 h50 r90